# Altium PCB final_pcb.PcbDoc (part 2 of 2)
Units mm, origin at the board's own origin, x right, y up, seen from the top; angles counter-clockwise.
Board outline 94.61 x 73.28 mm, 4 copper layers (Top Layer, Mid Layer 1, Mid Layer 2, Bottom Layer), stack 1.57 mm thick; 50 components, 37 nets, 197 pads, 62 vias.
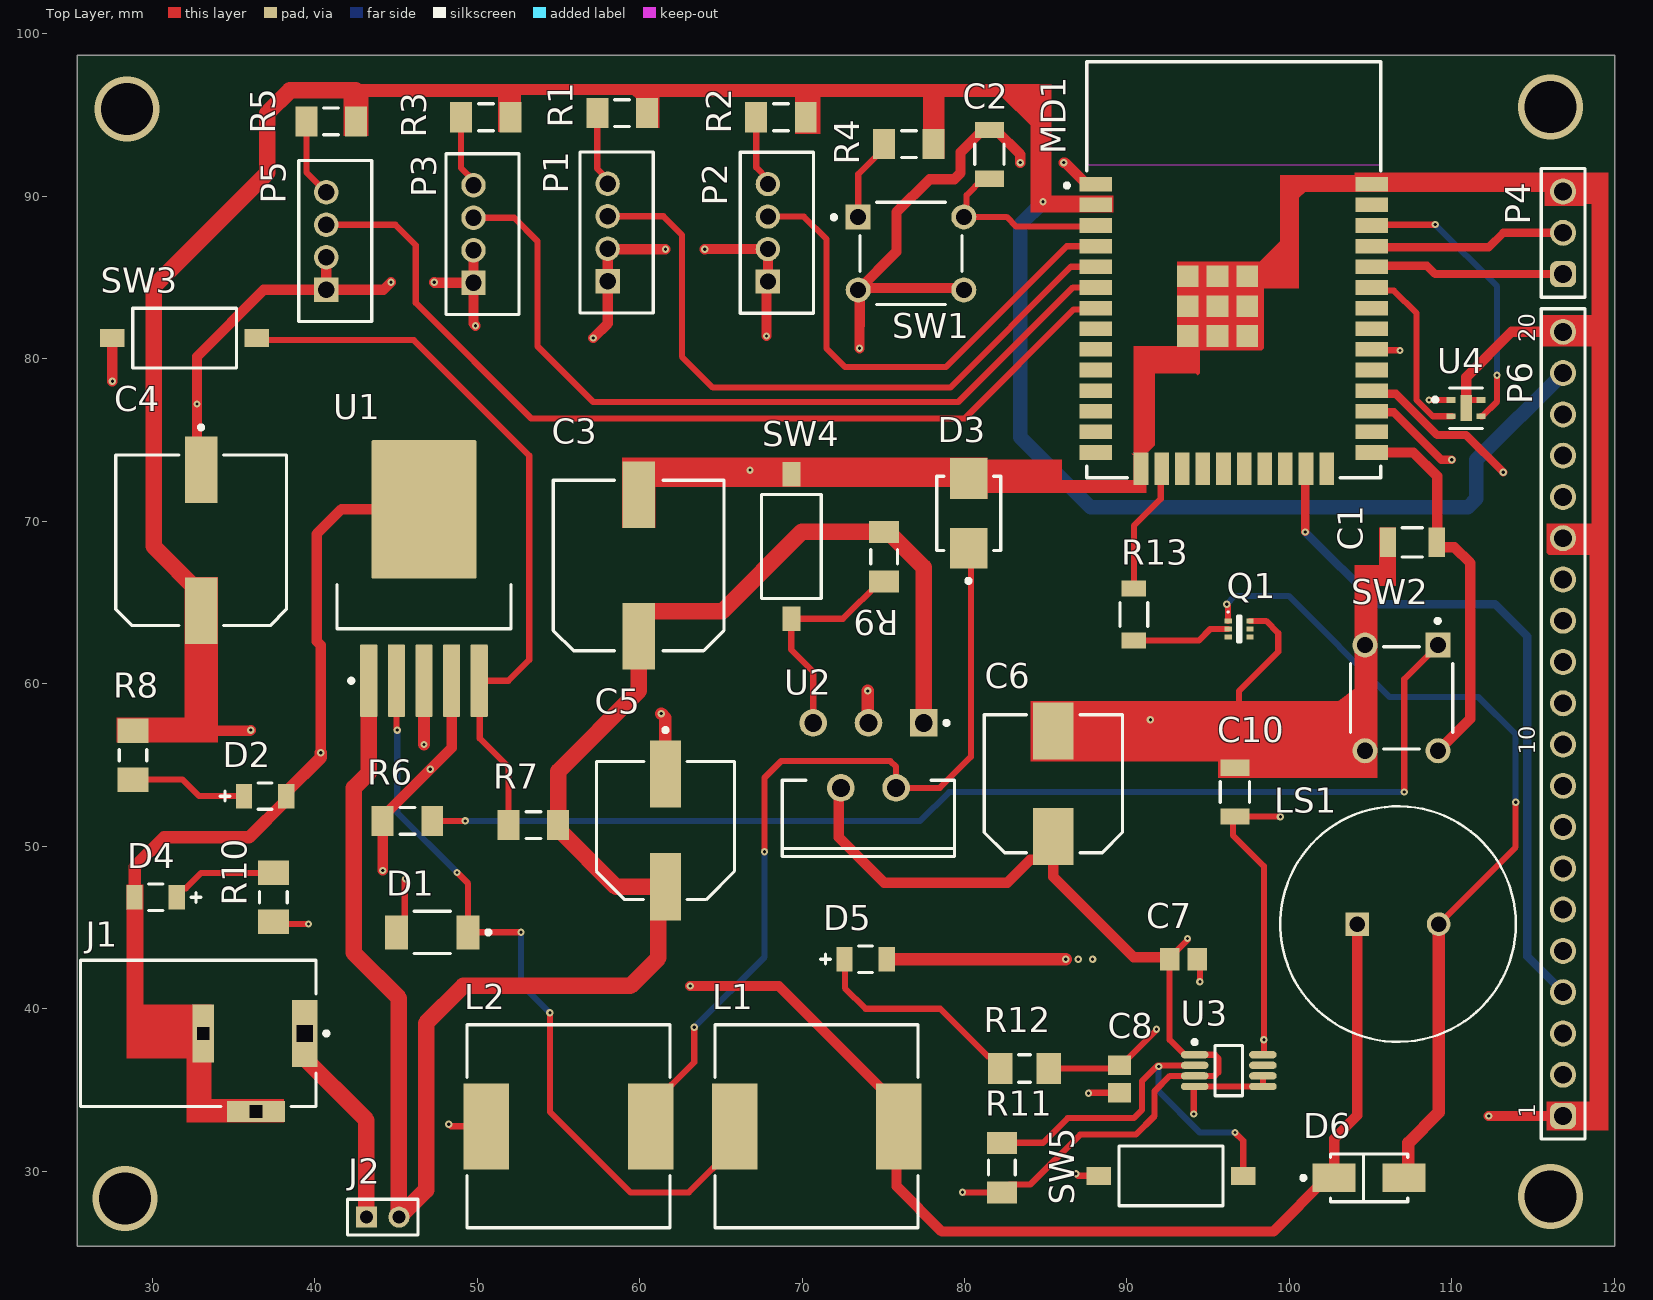
[diagram p0: Top Layer view]

## Other copper (continued)
Top Layer: (continued)
  region net GND: 58.928,69.596 60.96,69.596 60.96,72.136 79.121,72.136 79.121,71.374 81.407,71.374 81.407,73.914 58.928,73.914
  region net GND: 28.448,47.625 29.464,47.625 29.464,40.259 33.655,40.259 33.655,34.417 38.1,34.417 38.1,33.02 32.131,33.02 32.131,36.957 28.448,36.957
  region net FB3: 32.004,66.548 34.036,66.548 34.036,56.388 27.813,56.388 27.813,57.912 32.004,57.912
  region net FB3: 41.783,93.726 43.307,93.726 43.307,96.139 51.308,96.139 51.308,93.98 52.705,93.98 52.705,94.107 52.705,96.266 59.563,96.266 59.817,96.012 59.817,94.234 61.214,94.234 61.214,96.139 69.596,96.139 69.596,93.853 71.12,93.853 71.12,96.139 82.296,96.139 84.074,94.361 84.074,89.027 89.154,89.027 89.154,90.043 85.344,90.043 85.344,96.901 42.037,96.901 41.783,96.901
  region net FB3: 77.47,92.329 78.74,92.329 78.74,96.901 77.47,96.901
Mid Layer 1:
  region net GND: 85.852,43.688 88.265,43.688 88.265,41.783 85.852,41.783

## Dimensions
120.015,98.679 to 116.078,95.504 on Top Layer
116.078,95.504 to 120.015,98.679 on Top Layer
116.078,28.448 to 120.015,25.4 on Top Layer
116.078,28.448 to 120.015,25.4 on Top Layer
28.321,28.321 to 25.4,25.4 on Top Layer
28.321,28.321 to 25.4,25.4 on Top Layer
28.448,95.377 to 25.4,98.679 on Top Layer
28.448,95.377 to 25.4,98.679 on Top Layer

## Text inside footprints (layer, text, board x,y; h text height)
P6: Top Overlay "10" at 115.14,55.631 h1.02 r90; Top Overlay "1" at 115.14,33.281 h1.02 r90; Top Overlay "20" at 115.14,81.031 h1.02 r90